# Altium PCB Buzzer.PcbDoc
Units mil, origin at the board's own origin, x right, y up, seen from the top; angles counter-clockwise.
Board outline 1905 x 1240 mil, 2 copper layers (Top Layer, Bottom Layer); 6 components, 5 nets, 14 pads, 2 vias.
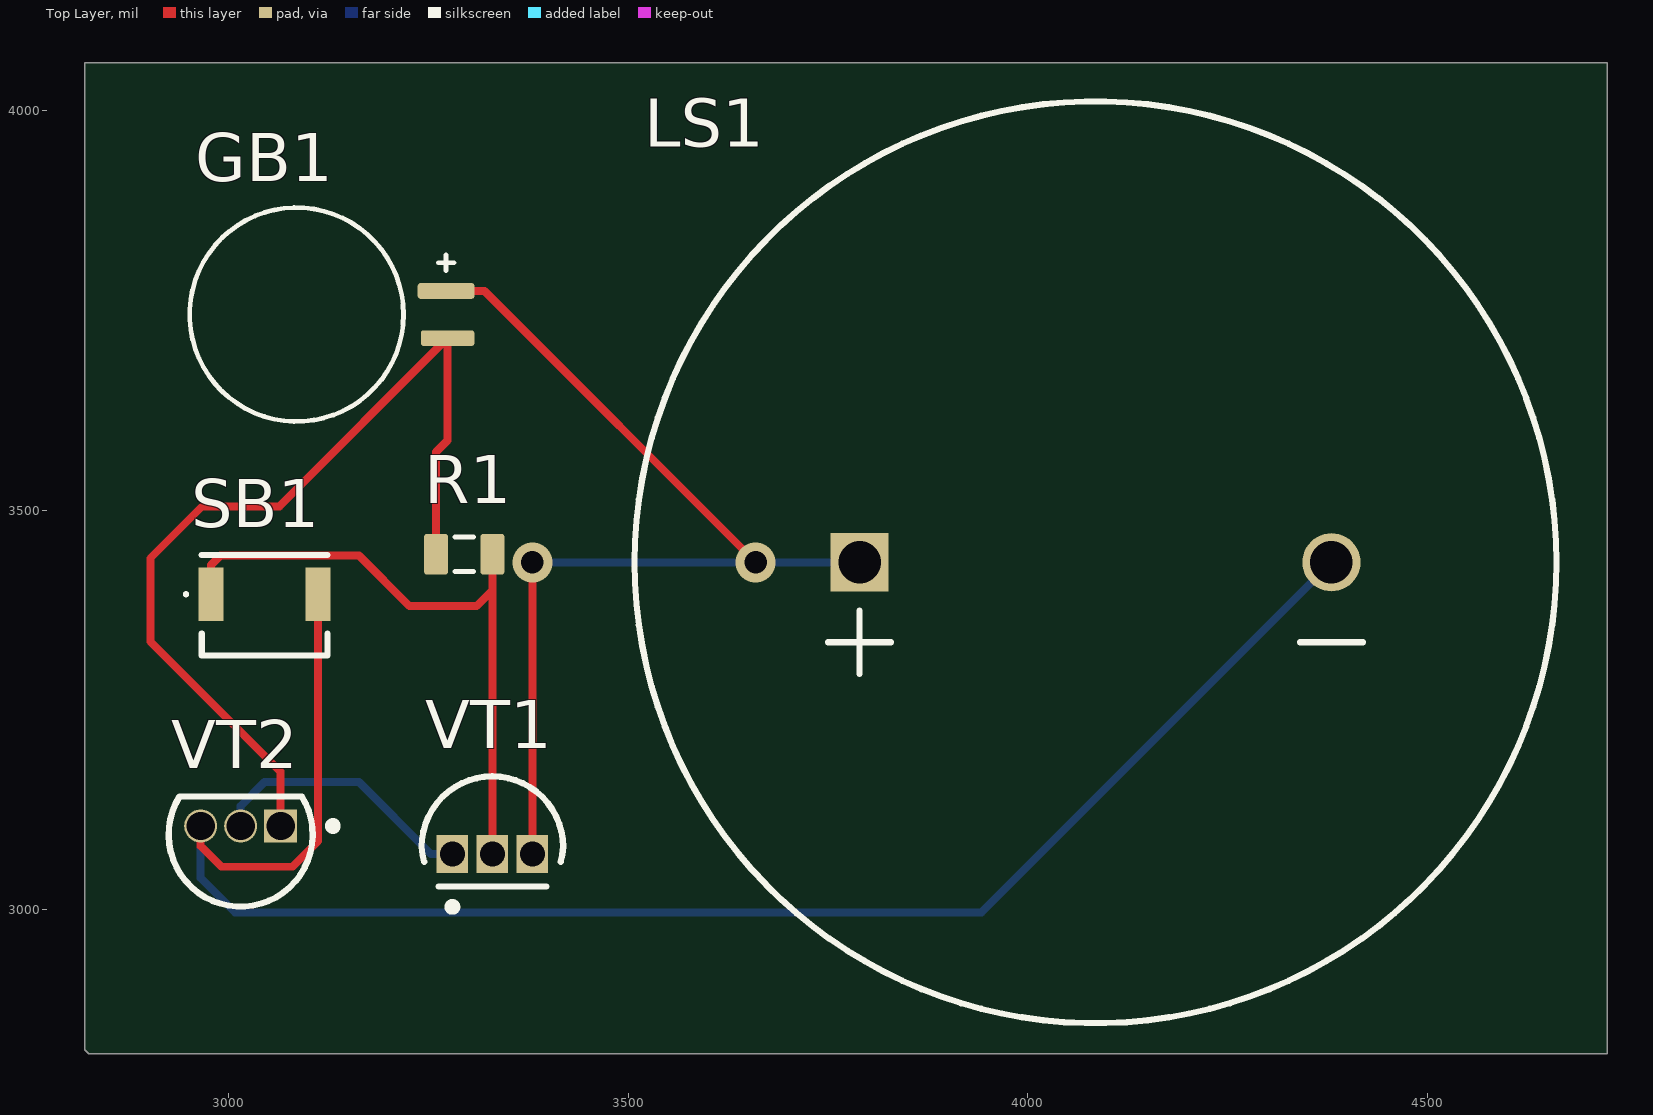
[diagram p0: Top Layer view]
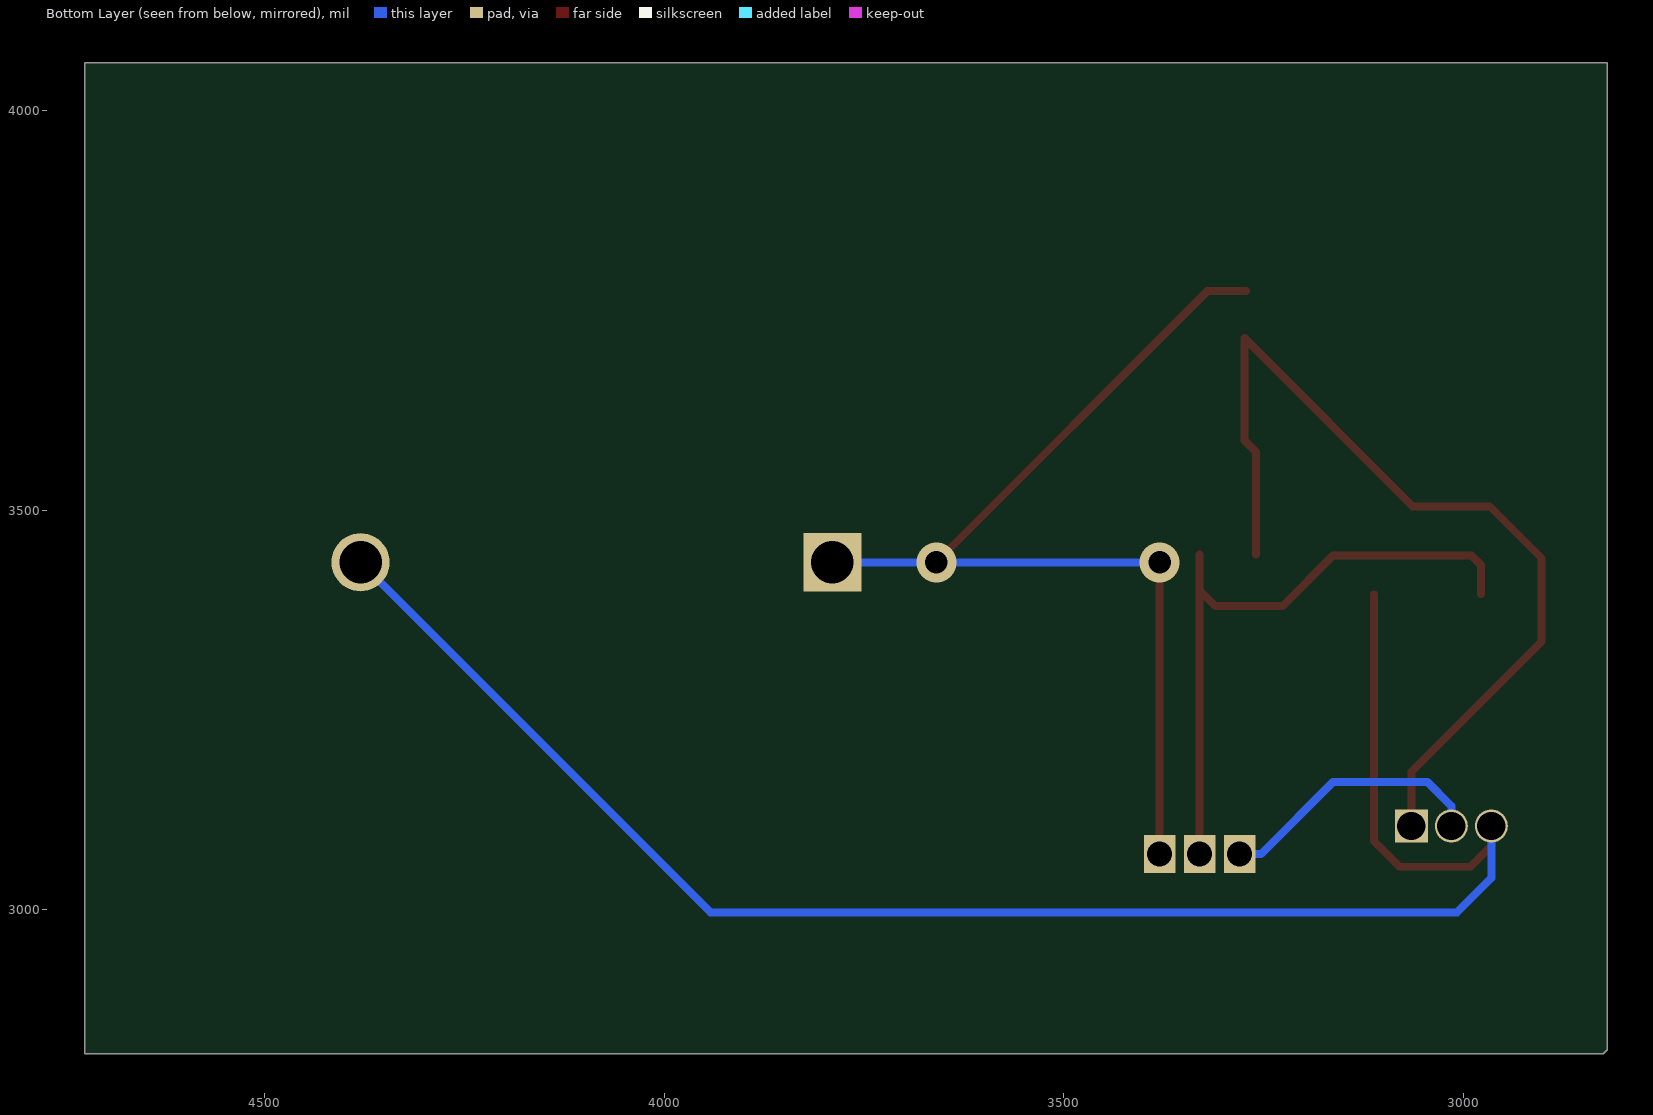
[diagram p1: Bottom Layer view, seen from below]

## Layer stack, top to bottom
Top Solder: solder mask 0.4, Solder Resist, Dk 3.5
Top Layer: signal copper 1.4
Dielectric 1: dielectric 12.6, FR-4, Dk 4.8
Bottom Layer: signal copper 1.4
Bottom Solder: solder mask 0.4, Solder Resist, Dk 3.5

## Board outline
4725,2820 2825,2820 2820,2825 2820,4060 4725,4060

## Design rules (kind name [scope] priority, off if disabled: settings)
Clearance [All] p1: gap=10 ignorepadtopadclearanceinfootprint=FALSE except(0: Arc-Hole Track-Hole SMDPad-Hole THPad-Hole Via-Hole Fill-Hole Poly-Hole Region-Hole Text-Hole)
PolygonConnect [All] p1: connectstyle=Relief reliefconductorwidth=10 reliefentries=4 polygonreliefangle="90 Angle" airgapwidth=10
RoutingVias [All] p1: holewidth=28 width=50 viastyle="Through Hole" minholewidth=28 minwidth=50 maxholewidth=28 maxwidth=50
SolderMaskExpansion [All] p1: expansion=4 istentingtop=FALSE
Width [All] p1: maxlimit=10 minlimit=10 preferedwidth=10
30 further rules are at their usual default settings.

## Components (designator, comment, footprint, x,y, rotation, side; value= is the part's Value field where it differs from the comment)
GB1 "4.5B" SEIK-MS621FE-FL11E-2_V 3085,3745 r0 top
LS1 "0.25GD-10" ADAI-ADA1898 4084.72,3435 r0 top
R1 "1KR5J" RESC0805(2012)_L 3295,3445 r0 top value=91k
SB1 "B3U-3000P" OMRON-B3U-3000P_V 3045,3395 r0 top
VT1 "КТ315Г" JSCJ-TO-92-3_V 3330,3070 r0 top
VT2 "КТ814А" UNIC-TO-92-3 3015,3105 r0 top

## Footprints (in the part's own frame and the unit in brackets; to place one, negate y for a bottom-side part, rotate by r counter-clockwise, add the part's x,y. Pads: shape width x height; smd on the part's side, far side on the other; paste and mask are expansions set on the pad)
ADAI-ADA1898 [mm] "THD, 2-Leads, Dia 29.3mm, Pitch 15mm"
  rect 1.85x1.85 hole 1.35: 1(-7.5,0)
  round 1.85 hole 1.35: 2(7.5,0)
  silkscreen extent -14.65,-14.65 14.65,14.65, body extent -14.65,-14.65 14.65,14.65, height 11.95
JSCJ-TO-92-3_V [mm] "TO-92, 3-leads, Height 4.7mm, Pitch 1.27mm"
  rect 1x1.2 hole 0.8: 1(-1.27,0) 2(0,0) 3(1.27,0)
  silkscreen extent -2.25,-1.81 2.25,2.47, body extent -2.25,-1.03 2.25,2.47, height 4.7
OMRON-B3U-3000P_V [mm] "SMD, 2-Leads, Body 4x3.2mm"
  rect 0.8x1.7 smd: 1(-1.7,0) 2(1.7,0)
  silkscreen extent -2.55,-1.95 2,1.25, body extent -2,-1.95 2,1.25, height 1.2
RESC0805(2012)_L [mm] "Chip Resistor, Body 2.0x1.3mm, IPC High Density"
  rrect25% 0.76x1.3 smd: 1(-0.9,0) 2(0.89,0)
  silkscreen extent -0.3,-0.55 0.3,0.55, body extent -1,-0.62 1,0.63, height 0.6
SEIK-MS621FE-FL11E-2_V [mm] "SMD, 2-Leads, Diameter 6.8mm"
  rrect35% 1.8x0.5 smd: 1(4.75,0.75)
  rrect35% 1.7x0.5 smd: 2(4.8,-0.75)
  silkscreen extent -3.4,-3.4 5,3.4, body extent -3.4,-3.4 4.35,3.4, height 2.7
UNIC-TO-92-3 [mm] "TO-92, 3-Leads, Dia 4.58mm, Pitch 1.27mm"
  rect 1.05x1.05 hole 0.9: 1(1.27,0)
  round 1.05 hole 0.9: 2(0,0) 3(-1.27,0)
  silkscreen extent -2.29,-2.56 3.05,0.94, body extent -2.3,-2.6 2.3,0.94, height 7.23

## Part data
GB1: library part CMP-00029-00000-1, "MS Lihium Rechargeable Battery, 3 V, -20 to 60 degC, Tray", Mounting Technology=WithLeads, Pins=2, RoHS Compliant=NotApplicable
LS1: library part CMP-00027-00000-1, "Mini Speaker, 8 Ohm, 0.2 Wmax, -10 to 40 degC, 2-Pin THD, RoHS", Case/Package=ADA1898, Manufacturer="Adafruit Industries", Package Description="2-Pin Through Hole Device, Dia 29.3 mm, Pitch 15 mm", Datasheet URL=https://cdn-shop.adafruit.com/datasheets/P1898.pdf, Datasheet Version=Mar-14, Manufacturer URL=https://www.adafruit.com/, Mounting Technology=TH, Package Reference=ADA1898, RoHS Compliant=Unknown
R1: library part CMP-009-00076-2, "1K 0.125W 5% 0805 (2012 Metric)  SMD", Case/Package=0805, Power=125mW, Tolerance=5%, Mounting Technology=SMT, Pins=2
SB1: library part CMP-011-00005-2, "Tactile Switch, SPST-NO, 0.05 A, 12 V, -25 to 70 degC, 2-Pin SMD, RoHS, Tape and Reel", Contact Current Rating=50mA, IP Rating=IP40, Manufacturer="Omron Electronic Components", Max Contact Resistance=100mohm, Max Operating Temperature=70°C, Max Voltage Rating (DC)=12V, Min Operating Temperature=-25°C, Operating Force=162gf, Package Description="2-Pin Surface Mount Device, Body 4 x 3.2 mm", Package Quantity=4000, Case/Package=B3U-3000P, Contact Material=Silver, Current Rating=50mA, Datasheet URL=https://www.omron.com/ecb/products/pdf/en-b3u.pdf, Datasheet Version=Jan-15, Manufacturer URL=http://www.omron.com/, Max Current Rating=50mA, Mounting Technology=SM, Package Reference=B3U-3000P, Packaging=TapeandReel, RoHS Compliant=True, Throw Configuration=SPST, Voltage Rating=12V, Voltage Rating (DC)=12V
VT1: library part CMP-013-00000-3, "Transistor, NPN, 0.1 uA, 150 MHz, 3-Pin TO-92", Case/Package=TO-92-3, Manufacturer="Jiangsu Changjiang Electronics Technology", Package Description="3-Pin Through Hole Device, Height 4.7 mm, Pitch 2.3 mm", Datasheet URL=http://www.cj-elec.com/txUpfile/20121910315050632.pdf, Datasheet Version="Rev. B, 11/2011", Mounting Technology=TH, Package Reference=TO-92-3, RoHS Compliant=False
VT2: library part CMP-013-00004-3, "Low Voltage High Current Small Signal PNP Transistor, 20 V, 700 mA, 3-Pin TO-92, RoHS", Case/Package=TO-92-3, Manufacturer=Unisonic, Package Description="3-Pin Through Hole Device, Dia 4.58 mm, Pitch 1.27 mm", Datasheet URL=http://media.nkcelectronics.com/datasheet/s8550.pdf, Datasheet Version="Rev. E, 06/2014", Mounting Technology=TH, Package Reference=TO-92-3, RoHS Compliant=Unknown

## Via types
v1: diameter 50, hole 28, Top Layer to Bottom Layer, 2 vias

## Nets (pads, with @x,y where several pads share a name; then routed paths per layer and width w, separated by ;. In a path a pad name is that pad's centre, name@x,y a point inside that pad or via, vN(x,y) a via of type N, cw(c..) or ccw(c..) an arc to the next point about the centre after c; other vN are vias at no path point)
NetGB1_1: GB1.1 LS1.1 VT1.3 | length 1302.6
  Top Layer w10: GB1.1 3320,3774.53 v1(3659.53,3435) ; VT1.3 v1(3380,3435)
  Bottom Layer w10: v1(3380,3435) v1(3659.53,3435) LS1.1
NetGB1_2: GB1.2 R1.1 VT2.1 | length 1165
  Top Layer w10: VT2.1 3065,3173 2902,3336 2902,3440 2967,3505 3063.5,3505 GB1.2 3273.98,3587.41 3259.57,3573 R1.1
NetLS1_2: LS1.2 SB1.2 VT2.3 | length 2184.2
  Top Layer w10: VT2.3 2965,3080 2991,3054 3080,3054 3111.93,3085.93 SB1.2
  Bottom Layer w10: VT2.3 2965,3040 3008,2997 3942,2997 LS1.2
NetR1_2: R1.2 SB1.1 VT1.2 | length 803
  Top Layer w10: SB1.1 2978.07,3431.54 2990,3443.47 3163,3443.47 3226.47,3380 3310.04,3380 3330.04,3400 ; VT1.2 3330,3257 3330.04,3257.04 3330.04,3400 ; R1.2 3330.04,3400
NetVT1_1: VT1.1 VT2.2 | length 339.7
  Bottom Layer w10: VT2.2 3015,3130 3045,3160 3163,3160 3253,3070 VT1.1